# EAGLE board Emech_DevBoard_v2.0 (EAGLE 9.0.1), part 1 of 2
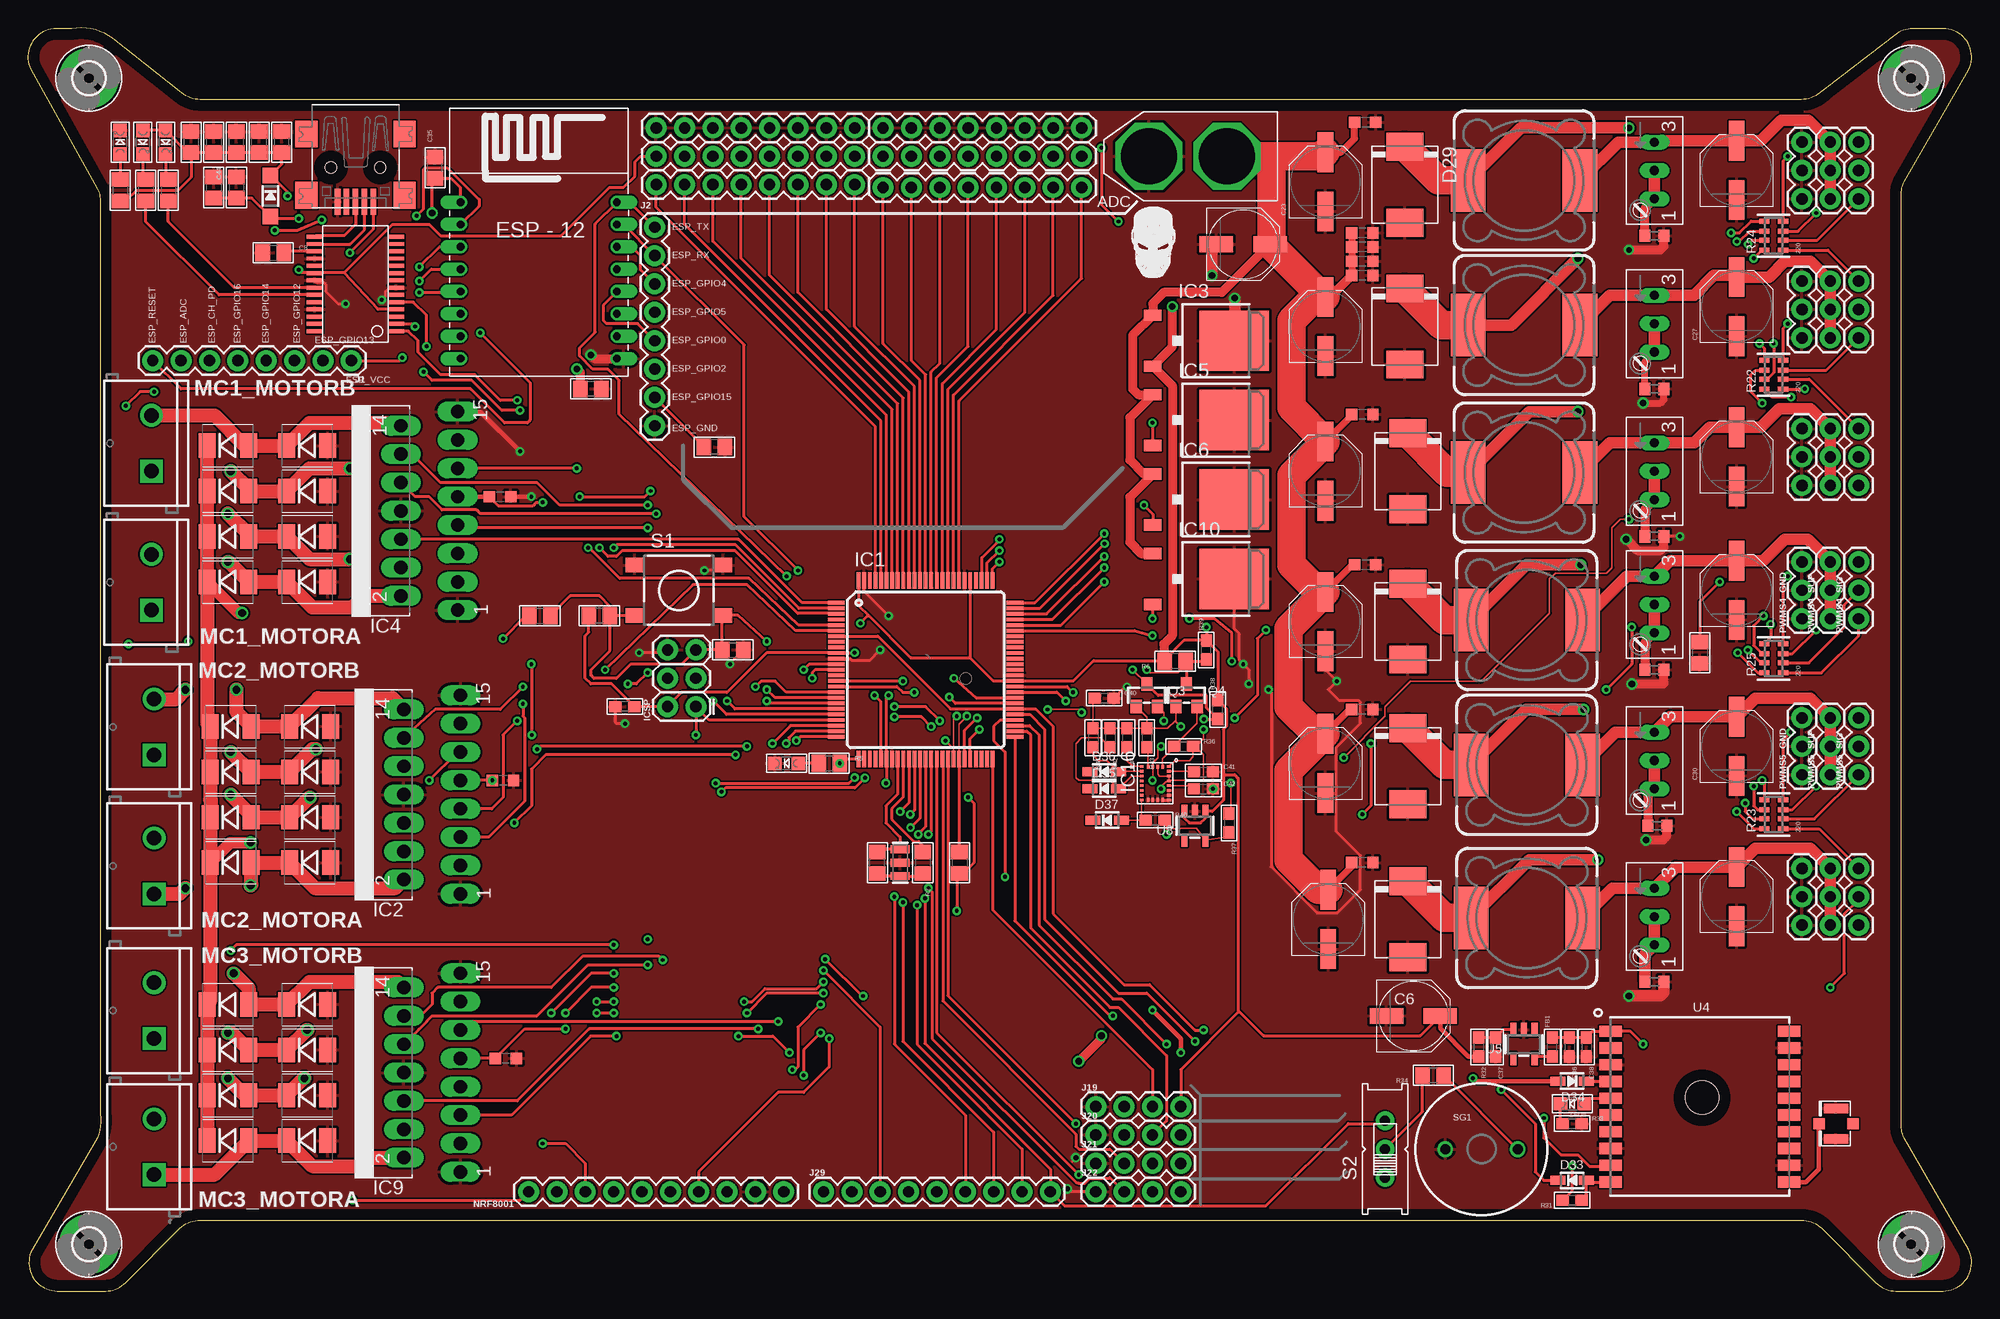
[diagram p0: board, top side]
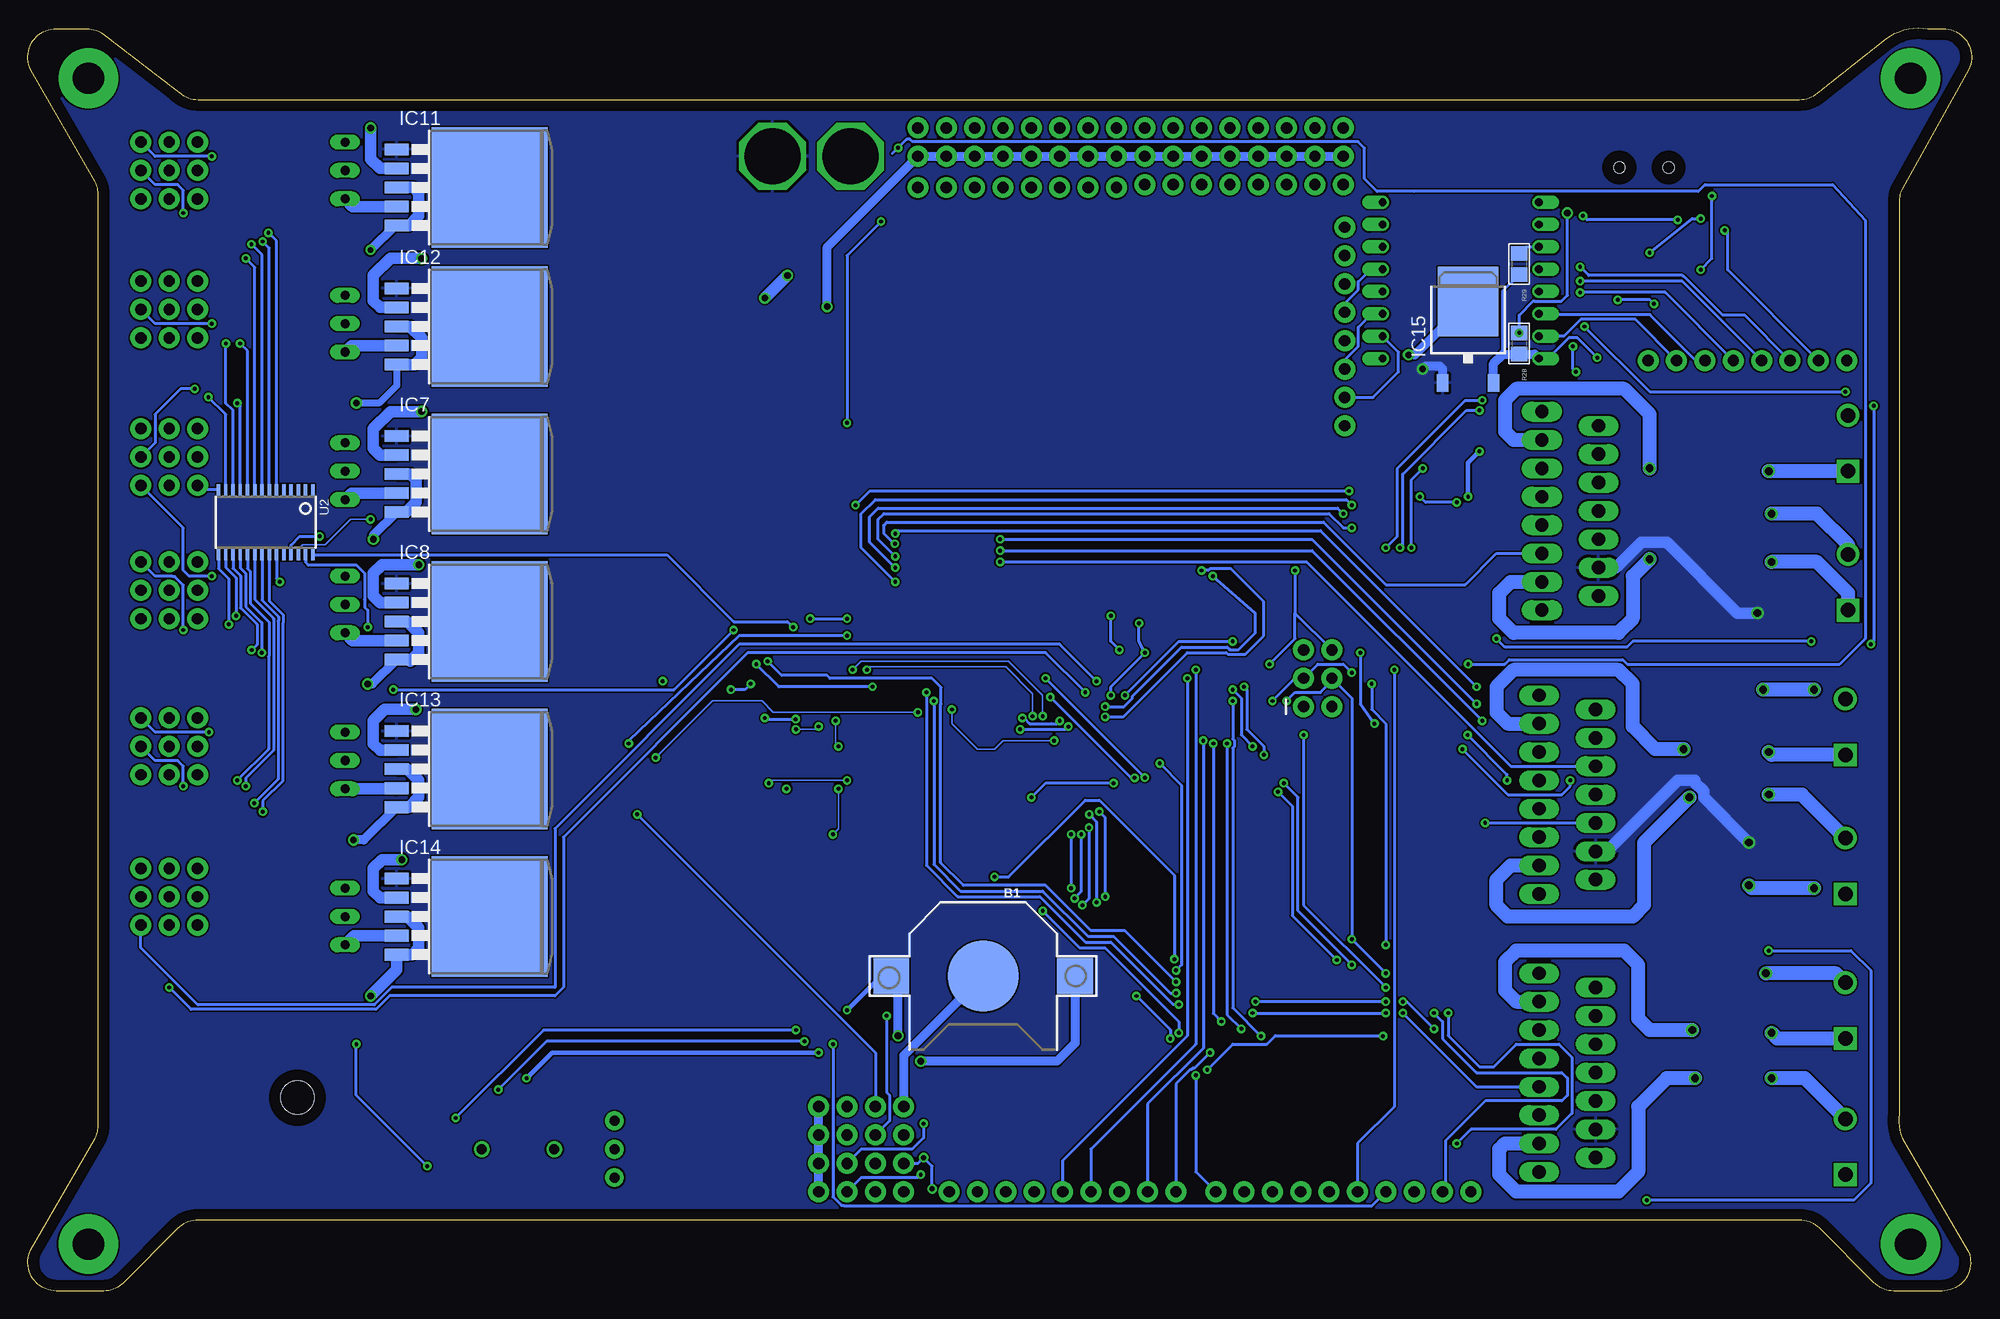
[diagram p1: board, bottom side, seen from below]

Size 174.08 x 113.09 mm. Coordinates in mm from the lower left corner, seen from the top.
Outline: 6.48,97.59 6.48,15.85 arc-27 6.21,13.68 0.37,3.69 arc117 2.63,0 6.95,0 arc45 8.75,0.74 13.61,5.61 arc-45 15.41,6.35 158.85,6.35 arc-45 160.64,5.61 165.5,0.74 arc45 167.3,0 171.54,0 arc117 173.81,3.68 168.04,13.69 arc-27 167.77,14.82 167.77,98.21 arc-27 168.04,99.34 173.81,109.35 arc117 171.54,113.03 168.82,113.03 arc45 167.03,112.29 160.64,107.42 arc-45 158.85,106.68 15.41,106.68 arc-45 13.61,107.42 7.61,112.16 arc45 3.91,113.03 2.54,113.03 arc116 0.25,109.38 6.23,98.7 arc-26 6.48,97.59
Copper layers (1*16): Top 0.035mm / dielectric 1.5mm / Bottom 0.035mm
Design rules "default *": minimum track width 6mil, minimum drill 0.35mm, track to track 6mil, track to pad 6mil, pad to pad 5mil, via to via 6mil, smd to smd 6mil, copper to edge 40mil, drill to drill 6mil, minimum pad ring 10mil, minimum via ring 8mil, stop-mask expansion 4mil, vias tented up to drill 0mil, thermal gap 10mil
Net classes: 1 16mil: width 0.254 mm, drill 0.254 mm, clearance 0.127 mm; 2 24mil: width 0.254 mm, drill 0.254 mm, clearance 0.127 mm; 3 32mil: width 0.254 mm, drill 0.254 mm, clearance 0.127 mm

## Footprints (pad centres in the part's own frame; a part is rotated, then mirrored left to right if it is on the bottom)
CR1220 = smd 3.2 x 3.2: +$1 -8.225,0; +$2 8.225,0 | smd 6.35 x 6.35: - 0,0
0805 = smd 1.3 x 1.5: 1 -0.95,0; 2 0.95,0
PANASONIC_D = smd 3 x 1.4: + 2.4,0; - -2.4,0
0603 = smd 1.016 x 1.016: 1 -0.953,0; 2 0.953,0
PANASONIC_D' = smd 3.556 x 1.4: + 2.654,0; - -2.654,0
0603' = smd 1.1 x 1: 1 -0.85,0; 2 0.85,0
USB-MINIB = smd 0.5 x 2.308: D+ 0,4.064; D- -0.8,4.064; GND 1.6,4.064; ID 0.8,4.064; VBUS -1.6,4.064 | smd 2 x 2.4: GND1 -4.4,-2; GND2 -4.4,3.5; GND3 4.4,3.5; GND4 4.4,-2 | hole 1: -2.2,1; 2.2,1
SOD-123 = smd 1.4 x 1.4: A 1.85,0; C -1.85,0
DO-214AA = smd 1.524 x 2.184: A 1.841,0; C -1.841,0
DO214AB = smd 2.5 x 3.3: A 3.4,0; C -3.4,0
SOD-323 = smd 1.35 x 0.8: A 1.27,0; C -1.27,0
2,8-PAD = drill 2.8 pad 5.334: B2,8 0,0
TQFP100 = smd 1.5 x 0.35: 1 -8,6; 2 -8,5.5; 3 -8,5; 4 -8,4.5; 5 -8,4; 6 -8,3.5; 7 -8,3; 8 -8,2.5; 9 -8,2; 10 -8,1.5; 11 -8,1; 12 -8,0.5; 13 -8,0; 14 -8,-0.5; 15 -8,-1; 16 -8,-1.5; 17 -8,-2; 18 -8,-2.5; 19 -8,-3; 20 -8,-3.5; 21 -8,-4; 22 -8,-4.5; 23 -8,-5; 24 -8,-5.5; 25 -8,-6; 51 8,-6; 52 8,-5.5; 53 8,-5; 54 8,-4.5; 55 8,-4; 56 8,-3.5; 57 8,-3; 58 8,-2.5; 59 8,-2; 60 8,-1.5; 61 8,-1; 62 8,-0.5; 63 8,0; 64 8,0.5; 65 8,1; 66 8,1.5; 67 8,2; 68 8,2.5; 69 8,3; 70 8,3.5; 71 8,4; 72 8,4.5; 73 8,5; 74 8,5.5; 75 8,6 | smd 0.35 x 1.5: 26 -6,-8; 27 -5.5,-8; 28 -5,-8; 29 -4.5,-8; 30 -4,-8; 31 -3.5,-8; 32 -3,-8; 33 -2.5,-8; 34 -2,-8; 35 -1.5,-8; 36 -1,-8; 37 -0.5,-8; 38 0,-8; 39 0.5,-8; 40 1,-8; 41 1.5,-8; 42 2,-8; 43 2.5,-8; 44 3,-8; 45 3.5,-8; 46 4,-8; 47 4.5,-8; 48 5,-8; 49 5.5,-8; 50 6,-8; 76 6,8; 77 5.5,8; 78 5,8; 79 4.5,8; 80 4,8; 81 3.5,8; 82 3,8; 83 2.5,8; 84 2,8; 85 1.5,8; 86 1,8; 87 0.5,8; 88 0,8; 89 -0.5,8; 90 -1,8; 91 -1.5,8; 92 -2,8; 93 -2.5,8; 94 -3,8; 95 -3.5,8; 96 -4,8; 97 -4.5,8; 98 -5,8; 99 -5.5,8; 100 -6,8
MULTIWATT-15 = drill 1.2 long: 1 -8.89,-7.62; 2 -7.62,-2.54; 3 -6.35,-7.62; 4 -5.08,-2.54; 5 -3.81,-7.62; 6 -2.54,-2.54; 7 -1.27,-7.62; 8 0,-2.54; 9 1.27,-7.62; 10 2.54,-2.54; 11 3.81,-7.62; 12 5.08,-2.54; 13 6.35,-7.62; 14 7.62,-2.54; 15 8.89,-7.62
TO252 = smd 1 x 1.6: 1 -2.28,-4.8; 2 2.28,-4.8 | smd 5.4 x 6.2: 3 0,2.5
TO263-5 = smd 1.067 x 2.159: 1 -3.404,-5.791; 2 -1.702,-5.791; 3 0,-5.791; 4 1.702,-5.791; 5 3.404,-5.791 | smd 10.8 x 10.41: 6 0,2.54
LGA24_3.5X3.1MM = smd 0.23 x 0.35: 1 -1.505,1.22; 6 -1.505,-1.22; 7 -1.075,-1.22; 8 -0.645,-1.22; 9 -0.215,-1.22; 10 0.215,-1.22; 11 0.645,-1.22; 12 1.075,-1.22; 13 1.505,-1.22; 18 1.505,1.22; 19 1.075,1.22; 20 0.645,1.22; 21 0.215,1.22; 22 -0.215,1.22; 23 -0.645,1.22; 24 -1.075,1.22 | smd 0.35 x 0.23: 2 -1.475,0.645; 3 -1.475,0.215; 4 -1.475,-0.215; 5 -1.475,-0.645; 14 1.475,-0.645; 15 1.475,-0.215; 16 1.475,0.215; 17 1.475,0.645
2X3 = drill 1.016 pad 1.88: 1 0,0; 2 0,2.54; 3 2.54,0; 4 2.54,2.54; 5 5.08,0; 6 5.08,2.54
1X08 = drill 1.016 pad 1.88: 1 0,0; 2 2.54,0; 3 5.08,0; 4 7.62,0; 5 10.16,0; 6 12.7,0; 7 15.24,0; 8 17.78,0
1X04 = drill 1.016 pad 1.88: 1 0,0; 2 2.54,0; 3 5.08,0; 4 7.62,0
1X09 = drill 1.016 pad 1.88: 1 0,0; 2 2.54,0; 3 5.08,0; 4 7.62,0; 5 10.16,0; 6 12.7,0; 7 15.24,0; 8 17.78,0; 9 20.32,0
SRR1280 = smd 5.6 x 3.1: 1 0.635,5; 2 0.635,-5
CHIPLED_0805 = smd 1.2 x 1.2: A 0,-1.05; C 0,1.05
SCREWTERMINAL-5MM-2 = drill 1.3 pad 2.032 square: 1 0,0 | drill 1.3 pad 2.032: 2 5,0
1X10 = drill 1.016 pad 1.88: 1 0,0; 2 2.54,0; 3 5.08,0; 4 7.62,0; 5 10.16,0; 6 12.7,0; 7 15.24,0; 8 17.78,0; 9 20.32,0; 10 22.86,0
1X03 = drill 1.016 pad 1.88: 1 0,0; 2 2.54,0; 3 5.08,0
SOT23-WIDE = smd 1 x 1.2: 1 -0.95,-1; 2 0.95,-1; 3 0,1
S64W = drill 0.813 long: A 2.54,1.27; E -2.54,1.27; S 0,1.27
R0603 = smd 1 x 1.1: 1 -0.85,0; 2 0.85,0
RESPACK_4X0603 = smd 0.45 x 0.9: 1 -1.3,-0.85; 2 -0.4,-0.85; 3 0.4,-0.85; 4 1.3,-0.85; 5 1.3,0.85; 6 0.4,0.85; 7 -0.4,0.85; 8 -1.3,0.85
DTSM-6 = smd 1.55 x 1.3: 1 -3.975,2.25; 2 3.975,2.25; 3 -3.975,-2.25; 4 3.975,-2.25
EG1218 = drill 0.9 pad 1.676: O -2.54,0; P 0,0; S 2.54,0
BUZZER-12MM = drill 0.9: + 3.25,0; - -3.25,0
SSOP28DB = smd 0.348 x 1.397: 1 -4.225,-3.656; 2 -3.575,-3.656; 3 -2.925,-3.656; 4 -2.275,-3.656; 5 -1.625,-3.656; 6 -0.975,-3.656; 7 -0.325,-3.656; 8 0.325,-3.656; 9 0.975,-3.656; 10 1.625,-3.656; 11 2.275,-3.656; 12 2.925,-3.656; 13 3.575,-3.656; 14 4.225,-3.656; 15 4.225,3.656; 16 3.575,3.656; 17 2.925,3.656; 18 2.275,3.656; 19 1.625,3.656; 20 0.975,3.656; 21 0.325,3.656; 22 -0.325,3.656; 23 -0.975,3.656; 24 -1.625,3.656; 25 -2.275,3.656; 26 -2.925,3.656; 27 -3.575,3.656; 28 -4.225,3.656
TSSOP28 = smd 0.305 x 0.991: 1 -4.225,-2.918; 2 -3.575,-2.918; 3 -2.925,-2.918; 4 -2.275,-2.918; 5 -1.625,-2.918; 6 -0.975,-2.918; 7 -0.325,-2.918; 8 0.325,-2.918; 9 0.975,-2.918; 10 1.625,-2.918; 11 2.275,-2.918; 12 2.925,-2.918; 13 3.575,-2.918; 14 4.225,-2.918; 15 4.225,2.918; 16 3.575,2.918; 17 2.925,2.918; 18 2.275,2.918; 19 1.625,2.918; 20 0.975,2.918; 21 0.325,2.918; 22 -0.325,2.918; 23 -0.975,2.918; 24 -1.625,2.918; 25 -2.275,2.918; 26 -2.925,2.918; 27 -3.575,2.918; 28 -4.225,2.918
ESP12 = drill 0.7 offset: ADC -7.1,3.8; CH_PD -7.1,1.8; GND 6.9,-8.2; GPIO0 6.9,-2.2; GPIO2 6.9,-4.2; GPIO4 6.9,1.8; GPIO5 6.9,-0.2; GPIO12 -7.1,-4.2; GPIO13 -7.1,-6.2; GPIO14 -7.1,-2.2; GPIO15 6.9,-6.2; GPIO16 -7.1,-0.2; RESET -7.1,5.8; RX 6.9,3.8; TX 6.9,5.8; VCC -7.1,-8.2
FGPMMOPA6H = smd 2 x 1: P$1 -8,6.75; P$2 -8,5.25; P$3 -8,3.75; P$4 -8,2.25; P$5 -8,0.75; P$6 -8,-0.75; P$7 -8,-2.25; P$8 -8,-3.75; P$9 -8,-5.25; P$10 -8,-6.75; P$11 8,-6.75; P$12 8,-5.25; P$13 8,-3.75; P$14 8,-2.25; P$15 8,-0.75; P$16 8,0.75; P$17 8,2.25; P$18 8,3.75; P$19 8,5.25; P$20 8,6.75 | hole 3: 0.2,0.8
SOT23-5 = smd 0.55 x 1.2: 1 -0.95,-1.3; 2 0,-1.3; 3 0.95,-1.3; 4 0.95,1.3; 5 -0.95,1.3
RESONATOR-SMD = smd 0.7 x 1.7: 1 -1.2,0; 2 0,0; 3 1.2,0
XT60 = drill 5 octagon: + 4.5,0; - 11.5,0
U.FL = smd 2.2 x 0.85: P$1 0,1.375; P$2 0,-1.375 | smd 1.05 x 1: P$3 1.525,0; P$4 -1.525,0

## Placement (x,y rotation side)
B1  CR1220  [CR1220]  88.52,28.19 180 bottom
C1  0.1uF  [0805]  20.71,102.87 90 top
C2  0.1uF  [0805]  22.74,102.87 90 top
C3  0.1uF  [0805]  18.67,102.87 90 top
C4  0.1uF  [0805]  63.12,57.4 0 top
C5  47uF  [PANASONIC_D]  108.84,93.73 0 top
C6  47uF  [PANASONIC_D]  124.08,24.64 0 top
C7  0.1uF  [0805]  45.85,60.45 0 top
C8  0.1uF  [0805]  21.98,92.96 0 top
C9  4.7uF  [0805]  18.67,98.81 270 top
C10  0.1uF  [0805]  16.64,98.81 270 top
C11  0.1uF  [0603]  119.51,94.74 180 top
C12  0.1uF  [0603]  42.3,71.12 180 top
C13  0.1uF  [0603]  119.51,93.47 180 top
C14  220uF@35V  [PANASONIC_D']  116.21,86.36 90 top
C15  0.1uF  [0603]  42.55,45.72 180 top
C16  220uF@35V  [PANASONIC_D']  153.04,74.68 90 top
C17  100nF  [0603]  119.77,104.65 180 top
C18  0.1uF  [0603]  42.8,20.83 180 top
C19  220uF@35V  [PANASONIC_D']  116.21,73.41 90 top
C20  220uF@35V  [PANASONIC_D']  153.04,62.74 90 top
C21  100nF  [0603]  119.51,90.93 180 top
C22  0.1uF  [0603]  119.51,92.2 180 top
C23  220uF@35V  [PANASONIC_D']  116.21,99.31 90 top
C24  220uF@35V  [PANASONIC_D']  153.04,100.33 90 top
C25  100nF  [0603]  119.51,78.49 180 top
C26  220uF@35V  [PANASONIC_D']  116.46,33.27 90 top
C27  220uF@35V  [PANASONIC_D']  153.04,88.14 90 top
C28  100nF  [0603]  119.77,65.02 180 top
C29  220uF@35V  [PANASONIC_D']  116.21,59.94 90 top
C30  220uF@35V  [PANASONIC_D']  153.04,48.77 90 top
C31  100nF  [0603]  119.51,52.07 180 top
C32  220uF@35V  [PANASONIC_D']  116.21,47.24 90 top
C33  220uF@35V  [PANASONIC_D']  153.04,35.31 90 top
C34  100nF  [0603]  119.51,38.35 180 top
C35  0.1uF  [0805]  36.45,100.58 90 top
C36  10µF  [0603']  138.05,21.84 270 top
C37  10µF  [0603']  131.45,21.84 270 top
C38  0.1µF  [0603']  139.58,21.84 270 top
C39  10µF  [0603']  53.47,52.32 180 top
C40  10µF  [0603']  96.4,53.09 0 top
C41  0.22uF  [0603']  105.29,46.48 0 top
C42  10uF  [0603']  105.29,44.96 0 top
C43  0.33uF  [0805]  50.42,80.77 180 top
C44  0.1uF  [0805]  16.64,102.87 270 top
CN2  [USB-MINIB]  29.34,101.6 180 top
D2  [SOD-123]  21.72,98.04 270 top
D3  SS24FSCT-ND  [DO-214AA]  25.02,63.5 0 top
D4  SS24FSCT-ND  [DO-214AA]  25.02,67.56 0 top
D5  SS24FSCT-ND  [DO-214AA]  25.02,71.63 0 top
D6  SS24FSCT-ND  [DO-214AA]  25.02,75.69 0 top
D7  SS24FSCT-ND  [DO-214AA]  17.91,75.69 0 top
D8  SS24FSCT-ND  [DO-214AA]  17.91,71.63 0 top
D9  SS24FSCT-ND  [DO-214AA]  17.91,67.56 0 top
D10  SS24FSCT-ND  [DO-214AA]  17.91,63.5 0 top
D11  SS24FSCT-ND  [DO-214AA]  18.17,38.35 0 top
D12  SS24FSCT-ND  [DO-214AA]  18.17,42.42 0 top
D13  SS24FSCT-ND  [DO-214AA]  18.17,46.48 0 top
D14  SS24FSCT-ND  [DO-214AA]  18.17,50.55 0 top
D15  SS24FSCT-ND  [DO-214AA]  25.28,38.35 0 top
D16  SS24FSCT-ND  [DO-214AA]  25.28,42.42 0 top
D17  SS24FSCT-ND  [DO-214AA]  25.28,46.48 0 top
D18  SS24FSCT-ND  [DO-214AA]  25.28,50.55 0 top
D19  SS54  [DO214AB]  123.58,73.41 270 top
D20  SS54  [DO214AB]  123.58,59.94 270 top
D21  SS24FSCT-ND  [DO-214AA]  17.91,13.46 0 top
D22  SS24FSCT-ND  [DO-214AA]  17.91,17.53 0 top
D23  SS24FSCT-ND  [DO-214AA]  17.91,21.59 0 top
D24  SS24FSCT-ND  [DO-214AA]  17.91,25.65 0 top
D25  SS24FSCT-ND  [DO-214AA]  25.02,13.46 0 top
D26  SS24FSCT-ND  [DO-214AA]  25.02,17.53 0 top
D27  SS24FSCT-ND  [DO-214AA]  25.02,21.59 0 top
D28  SS24FSCT-ND  [DO-214AA]  25.02,25.65 0 top
D29  SS54  [DO214AB]  123.32,99.06 270 top
D30  SS54  [DO214AB]  123.32,86.36 270 top
D31  SS54  [DO214AB]  123.58,46.99 270 top
D32  SS54  [DO214AB]  123.58,33.27 270 top
D33  1N4148  [SOD-323]  138.31,9.91 0 top
D34  CUS520  [SOD-323]  138.31,18.8 180 top
D35  1N4148  [SOD-323]  96.4,44.96 0 top
D36  1N4148  [SOD-323]  96.4,46.48 0 top
D37  1N4148  [SOD-323]  96.65,42.16 0 top
FB1  [0603']  136.53,21.84 90 top
H1  MOUNT-PAD-ROUND2.8  [2,8-PAD]  168.66,4.19 0 top
H2  MOUNT-PAD-ROUND2.8  [2,8-PAD]  168.66,108.58 0 top
H3  MOUNT-PAD-ROUND2.8  [2,8-PAD]  5.47,108.58 0 top
H4  MOUNT-PAD-ROUND2.8  [2,8-PAD]  5.47,4.19 0 top
IC1  ATMEGA2560  [TQFP100]  80.4,55.63 0 top
IC2  L298  [MULTIWATT-15]  31.12,44.45 90 top
IC3  UA78M05  [TO252]  105.54,85.09 270 top
IC4  L298  [MULTIWATT-15]  30.87,69.85 90 top
IC5  7806DT  [TO252]  105.54,77.98 270 top
IC6  7806DT  [TO252]  105.54,70.87 270 top
IC7  LM2596S  [TO263-5]  135.26,73.15 270 bottom
IC8  LM2596S  [TO263-5]  135.26,59.94 270 bottom
IC9  L298  [MULTIWATT-15]  31.12,19.56 90 top
IC10  7806DT  [TO252]  105.54,63.75 270 top
IC11  LM2596S  [TO263-5]  135.26,98.81 270 bottom
IC12  LM2596S  [TO263-5]  135.26,86.36 270 bottom
IC13  LM2596S  [TO263-5]  135.26,46.74 270 bottom
IC14  LM2596S  [TO263-5]  135.26,33.53 270 bottom
IC15  7806DT  [TO252]  45.09,86.11 0 bottom
IC16  LSM9DS1  [LGA24_3.5X3.1MM]  100.97,45.47 270 top
ICSP  FEMALE 2x3  [2X3]  59.82,52.32 90 top
J1  [1X08]  28.96,83.31 180 top
J2  [1X08]  56.14,95.25 270 top
J19  [1X04]  95.64,16.51 0 top
J20  [1X04]  95.64,13.97 0 top
J21  [1X04]  95.64,11.43 0 top
J22  [1X04]  95.64,8.89 0 top
J23  [1X08]  76.59,101.6 0 top
J24  [1X08]  76.59,104.14 0 top
J25  [1X08]  74.05,99.06 180 top
J26  [1X08]  56.27,104.14 0 top
J27  [1X08]  56.27,101.6 0 top
J28  [1X08]  94.37,98.81 180 top
J29  [1X09]  71.25,8.89 0 top
L1  SRR1280-330mH  [SRR1280]  133.99,72.64 90 top
L2  SRR1280-330mH  [SRR1280]  134.24,59.44 90 top
L3  SRR1280-330mH  [SRR1280]  133.99,98.81 90 top
L4  SRR1280-330mH  [SRR1280]  133.99,85.85 90 top
L5  SRR1280-330mH  [SRR1280]  134.24,46.48 90 top
L6  SRR1280-330mH  [SRR1280]  134.24,32.77 90 top
LED1  GREEN  [CHIPLED_0805]  8.26,102.87 0 top
LED2  YELLOW  [CHIPLED_0805]  67.95,47.24 90 top
LED3  BLUE  [CHIPLED_0805]  10.29,102.87 180 top
LED4  RED  [CHIPLED_0805]  12.32,102.87 180 top
LED5  RED  [CHIPLED_0805]  138.31,16.76 90 top
MC1_MOTORA  [SCREWTERMINAL-5MM-2]  11.05,60.96 90 top
MC1_MOTORB  [SCREWTERMINAL-5MM-2]  11.05,73.41 90 top
MC2_MOTORA  [SCREWTERMINAL-5MM-2]  11.31,35.56 90 top
MC2_MOTORB  [SCREWTERMINAL-5MM-2]  11.31,48.01 90 top
MC3_MOTORA  [SCREWTERMINAL-5MM-2]  11.31,10.41 90 top
MC3_MOTORB  [SCREWTERMINAL-5MM-2]  11.31,22.61 90 top
NRF8001  [1X10]  44.84,8.89 0 top
PWMS1_GND  [1X03]  158.88,97.79 90 top
PWMS1_SIG  [1X03]  163.96,97.79 90 top
PWMS1_SUP  [1X03]  161.42,97.79 90 top
PWMS2_GND  [1X03]  158.88,85.34 90 top
PWMS2_SIG  [1X03]  163.96,85.34 90 top
PWMS2_SUP  [1X03]  161.42,85.34 90 top
PWMS3_GND  [1X03]  158.88,72.14 90 top
PWMS3_SIG  [1X03]  163.96,72.14 90 top
PWMS3_SUP  [1X03]  161.42,72.14 90 top
PWMS4_GND  [1X03]  158.88,60.2 90 top
PWMS4_SIG  [1X03]  163.96,60.2 90 top
PWMS4_SUP  [1X03]  161.42,60.2 90 top
PWMS5_GND  [1X03]  158.88,46.23 90 top
PWMS5_SIG  [1X03]  163.96,46.23 90 top
PWMS5_SUP  [1X03]  161.42,46.23 90 top
PWMS6_GND  [1X03]  158.88,32.77 90 top
PWMS6_SIG  [1X03]  163.96,32.77 90 top
PWMS6_SUP  [1X03]  161.42,32.77 90 top
Q3  BSS138  [SOT23-WIDE]  100.21,53.34 0 top
Q4  BSS138  [SOT23-WIDE]  103.76,53.34 0 top
R1  1m  [0805]  76.08,38.35 90 top
R2  27  [0805]  80.14,38.35 270 top
R3  10k  [0805]  51.19,60.45 180 top
R4  1k  [0805]  8.26,98.55 270 top
R5  1k  [0805]  71.76,47.24 0 top
R6  10k  [0805]  102.75,56.39 180 top
R7  10k  [0805]  83.44,38.35 270 top
R8  680  [0805]  10.55,98.55 270 top
R9  680  [0805]  12.58,98.55 270 top
R10  10k  [S64W]  144.4,73.41 270 top
R11  330  [R0603]  145.67,67.56 180 top
R12  10k  [S64W]  144.4,61.47 270 top
R13  330  [R0603]  145.67,55.63 180 top
R14  10k  [S64W]  144.4,100.33 270 top
R15  330  [R0603]  145.67,94.49 180 top
R16  10k  [S64W]  144.4,86.61 270 top
R17  330  [R0603]  145.67,80.77 180 top
R18  10k  [S64W]  144.4,47.5 270 top
R19  330  [R0603]  145.93,41.66 180 top
R20  10k  [S64W]  144.4,33.53 270 top
R21  330  [R0603]  145.67,27.69 180 top
R22  220  [RESPACK_4X0603]  156.34,82.04 90 top
R23  220  [RESPACK_4X0603]  156.34,42.67 90 top
R24  220  [RESPACK_4X0603]  156.34,94.49 90 top
R25  220  [RESPACK_4X0603]  156.34,56.64 90 top
R26  10k  [0805]  149.74,57.15 270 top
R27  10k  [0805]  14.61,102.87 270 top
R28  10k  [0805]  40.52,84.84 270 bottom
R29  1k  [0805]  40.52,91.95 270 bottom
R30  1k  [0805]  61.47,75.56 180 top
R31  10k  [0603']  138.31,8.13 180 top
R32  10k  [0603']  129.93,21.84 270 top
R33  1k  [0603']  138.31,14.99 0 top
R34  100  [0805]  125.86,19.3 180 top
R36  10K  [0603']  103.51,48.77 0 top
R37  10K  [0603']  107.57,41.91 270 top
R38  10K  [0603']  106.56,52.07 90 top
R39  10K  [0603']  105.54,57.4 90 top
R40  10K  [0603']  100.97,42.16 0 top
R41  10K  [0603']  95.38,49.53 270 top
R42  10K  [0603']  96.91,49.53 270 top
R43  10K  [0603']  100.21,49.53 270 top
R44  10K  [0603']  98.43,49.53 270 top
S1  DTSM-6  [DTSM-6]  58.3,62.74 0 top
S2  [EG1218]  121.54,12.7 90 top
SG1  BUZZERPTH  [BUZZER-12MM]  130.18,12.7 0 top
U1  [SSOP28DB]  29.34,90.17 90 top
U2  PCA9685  [TSSOP28]  152.79,68.83 180 bottom
U3  [ESP12]  45.85,91.69 0 top
U4  FGPMMOPA6H  [FGPMMOPA6H]  149.74,16.51 0 top
U5  MIC5225-3.3  [SOT23-5]  133.99,22.1 180 top
U8  MIC5225-3.3  [SOT23-5]  104.53,41.66 180 top
U$1  RESONATORSMD  [RESONATOR-SMD]  78.11,38.35 270 top
U$14  XT60  [XT60]  111.89,101.6 180 top
U$55  U.FL  [U.FL]  161.93,14.99 180 top

## Library data of the parts
B1 C1-C4 C7-C10 C14 C16 C19 C20 C23 C24 C26 C27 C29 C30 C32 C33 C35-C44 D2 D33-D37 FB1 IC16 LED1-LED5 Q3 Q4 R1-R9 R22-R34 R36-R44 U1 U2 U4 U5 U8 U$55 = microbuilder
C5 C6 = rcl; SPICEPREFIX: C
C11-C13 C15 C17 C18 C21 C22 C25 C28 C31 C34 = cap-master
CN2 IC3 IC5 IC6 IC10 IC15 R11 R13 R15 R17 R19 R21 S2 = adafruit
D3-D18 D21-D28 = BeagleBone_Blue_R3
D19 D20 D29-D32 = s3x_10; MF: Fairchild; MPN: S3G; OC_FARNELL: 2454094; OC_NEWARK: 58K2397
H1-H4 = holes
IC1 = atmel-2005
IC2 IC4 IC9 = st-microelectronics; MPN: L298N; OC_FARNELL: 1589425; OC_NEWARK: 32M1527
IC7 IC8 IC11-IC14 = national-semiconductor; MF: NATIONAL SEMICONDUCTOR; MPN: LM2596S-ADJ/NOPB; OC_FARNELL: 9494367; OC_NEWARK: 41K3842
ICSP = SparkFun-Connectors; PROD_ID: CONN-11566
J1 J2 J23-J28 = SparkFun-Connectors; PROD_ID: CONN-08438
J19-J22 = SparkFun-Connectors; PROD_ID: CONN-09696
J29 PWMS1_GND PWMS1_SIG PWMS1_SUP PWMS2_GND PWMS2_SIG PWMS2_SUP PWMS3_GND PWMS3_SIG PWMS3_SUP PWMS4_GND PWMS4_SIG PWMS4_SUP PWMS5_GND PWMS5_SIG PWMS5_SUP PWMS6_GND PWMS6_SIG PWMS6_SUP = SparkFun-Connectors
L1-L6 = inductor-bourns
MC1_MOTORA MC1_MOTORB MC2_MOTORA MC2_MOTORB MC3_MOTORA MC3_MOTORB = SparkFun-Connectors; SF_SKU: PRT-08432
NRF8001 = SparkFun-Connectors; PROD_ID: CONN-11563
R10 R12 R14 R16 R18 R20 = pot
S1 = switch-tact
SG1 U$1 = SparkFun
U3 = esp8266modules
U$14 = XT60

## Nets
1PPS: U4.P$13
3.3V [16mil]: C8.2 U1.17
5.0V: U5.1
A0: U2.1
A1: U2.2
A2: U2.3
A3: U2.4
A4: U2.5
A5: U2.24
ADC0: IC1.97 J25.8
ADC1: IC1.96 J25.7
ADC2: IC1.95 J25.6
ADC3: IC1.94 J25.5
ADC4: IC1.93 J25.4
ADC5: IC1.92 J25.3
ADC6: IC1.91 J25.2
ADC7: IC1.90 J25.1
ADC8: IC1.89 J28.8
ADC9: IC1.88 J28.7
ADC10: IC1.87 J28.6
ADC11: IC1.86 J28.5
ADC12: IC1.85 J28.4
ADC13: IC1.84 J28.3
ADC14: IC1.83 J28.2
ADC15: IC1.82 J28.1
AREF: IC1.98
AUX_D1: IC1.38 J29.9 S2.S
AUX_D2: IC1.37 J29.8
AUX_D3: IC1.36 J29.7
AUX_D4: IC1.35 J29.6
AUX_D5: IC1.13 J29.5
AUX_D6: IC1.12 J29.4
AUX_D7: IC1.26 J29.3 R5.2
AUX_D8: IC1.25 J29.2
AUX_D9: IC1.19 J29.1
C2: C41.1 IC16.24
CAP1: C42.1 IC16.21
CS_A/G: D36.A IC16.7 R41.2
CS_AG_5V: D36.C
CS_M: D35.A IC16.8 R42.2
CS_M_5V: D35.C
D0/RX0: IC1.2 U1.1
D1/TX0: IC1.3 U1.5
D9: NRF8001.6
D14/TX3: IC1.64
D15/RX3: IC1.63
D+: CN2.D+ U1.15
D-: CN2.D- U1.16
DEN_3V: D37.A IC16.13 R40.1
DEN_5V: D37.C
DRDY_M: IC16.9
ESP_ADC: J1.7 U3.ADC
ESP_CH_PD: J1.6 R29.1 U3.CH_PD
ESP_GPIO0: J2.5 U3.GPIO0
ESP_GPIO2: J2.6 U3.GPIO2
ESP_GPIO4: J2.3 U3.GPIO4
ESP_GPIO5: J2.4 U3.GPIO5
ESP_GPIO12: J1.3 U3.GPIO12
ESP_GPIO13: J1.2 U3.GPIO13
ESP_GPIO14: J1.4 U3.GPIO14
ESP_GPIO15: J2.7 R30.2 U3.GPIO15
ESP_GPIO16: J1.5 U3.GPIO16
ESP_RESET: C35.1 J1.8 R28.1 U3.RESET
ESP_VCC: IC15.2 J1.1 R28.2 R29.2 U3.VCC
FIX: LED5.A U4.P$5
GND [32mil]: B1.- C1.2 C2.2 C3.2 C4.2 C5.- C6.- C8.1 C9.1 C10.1 C11.1 C12.1 C13.1 C14.- C15.1 C16.- C17.1 C18.1 C19.- C20.- C21.1 C22.1 C23.- C24.- C25.1 C26.- C27.- C28.1 C29.- C30.- C31.1 C32.- C33.- C34.1 C35.2 C36.2 C37.2 C38.2 C39.2 C40.2 C41.2 C42.2 C43.1 C44.1 CN2.GND D3.A D4.A D5.A D6.A D15.A D16.A D17.A D18.A D19.A D20.A D25.A D26.A D27.A D28.A D29.A D30.A D31.A D32.A H1.B2,8 H2.B2,8 H3.B2,8 H4.B2,8 IC1.11 IC1.32 IC1.62 IC1.81 IC1.99 IC2.1 IC2.8 IC2.15 IC3.3 IC4.1 IC4.8 IC4.15 IC5.3 IC6.3 IC7.3 IC7.5 IC8.3 IC8.5 IC9.1 IC9.8 IC9.15 IC10.3 IC11.3 IC11.5 IC12.3 IC12.5 IC13.3 IC13.5 IC14.3 IC14.5 IC15.3 IC16.14 IC16.15 IC16.16 IC16.17 IC16.18 IC16.19 IC16.20 ICSP.6 J2.8 J19.1 J20.1 J21.1 J22.1 J24.1 J24.2 J24.3 J24.4 J24.5 J24.6 J24.7 J24.8 J26.1 J26.2 J26.3 J26.4 J26.5 J26.6 J26.7 J26.8 LED1.C LED2.C NRF8001.9 PWMS1_GND.1 PWMS1_GND.2 PWMS1_GND.3 PWMS2_GND.1 PWMS2_GND.2 PWMS2_GND.3 PWMS3_GND.1 PWMS3_GND.2 PWMS3_GND.3 PWMS4_GND.1 PWMS4_GND.2 PWMS4_GND.3 PWMS5_GND.1 PWMS5_GND.2 PWMS5_GND.3 PWMS6_GND.1 PWMS6_GND.2 PWMS6_GND.3 R11.1 R13.1 R15.1 R17.1 R19.1 R21.1 R26.2 R27.1 R30.1 R33.2 S1.1 S1.2 SG1.- U1.7 U1.18 U1.21 U1.25 U2.14 U2.25 U3.GND U4.P$3 U4.P$8 U4.P$12 U4.P$19 U5.2 U8.2 U$1.2 U$14.- U$55.P$1 U$55.P$2
GPS_RX: D33.C IC1.55
GPS_TX: IC1.7 IC1.56 U4.P$9
INT1_AG: IC16.11
INT2_AG: IC16.12
INT_M: IC16.10
MCONTROLR1_INP1: IC1.78 IC2.5
MCONTROLR1_INP2: IC1.77 IC2.7
MCONTROLR1_INP3: IC1.76 IC2.10
MCONTROLR1_INP4: IC1.75 IC2.12
MCONTROLR2_INP1: IC1.74 IC4.5
MCONTROLR2_INP2: IC1.73 IC4.7
MCONTROLR2_INP3: IC1.72 IC4.10
MCONTROLR2_INP4: IC1.71 IC4.12
MCONTROLR3_INP1: IC1.60 IC9.5
MCONTROLR3_INP2: IC1.59 IC9.7
MCONTROLR3_INP3: IC1.58 IC9.10
MCONTROLR3_INP4: IC1.57 IC9.12
MISO: IC1.22 ICSP.1 NRF8001.2
MOSI: IC1.21 ICSP.4 NRF8001.3
MOTOR1_PWM_A: IC1.1 IC4.6
MOTOR1_PWM_B: IC1.5 IC4.11
MOTOR2_PWM_A: IC1.17 IC2.6
MOTOR2_PWM_B: IC1.18 IC2.11
MOTOR3_PWM_A: IC1.23 IC9.6
MOTOR3_PWM_B: IC1.24 IC9.11
N$1: IC1.65
N$2: IC1.66
N$3: R1.1 R2.2 U$1.3
N$4: IC1.67
N$5: IC1.68
N$6: IC1.69
N$7: IC1.79
N$8: IC1.27
N$9: IC1.9
N$10: IC1.49
N$11: IC1.48
N$12: IC1.47
N$13: IC1.14
N$14: IC1.8
N$15: C12.2 IC4.9 IC6.2
N$16: D19.C IC7.2 L1.1
N$17: C15.2 IC2.9 IC5.2
N$18: IC1.4
N$19: LED1.A R4.1
N$20: LED2.A R5.1
N$21: LED3.C R8.1
N$22: R9.2 U1.22
N$23: R8.2 U1.23
N$24: LED4.C R9.1
N$25: IC1.29
N$26: IC1.28
N$27: IC7.4 R10.A R10.S R11.2
N$28: U1.26
N$29: U1.11
N$30: U1.3
N$31: C7.1 U1.2
N$32: D20.C IC8.2 L2.1
N$33: D3.C D10.A IC4.2 MC1_MOTORA.1
N$34: D4.C D9.A IC4.3 MC1_MOTORA.2
N$35: D5.C D8.A IC4.13 MC1_MOTORB.1
N$36: D6.C D7.A IC4.14 MC1_MOTORB.2
N$37: IC8.4 R12.A R12.S R13.2
N$38: D21.A D25.C IC9.2 MC3_MOTORA.1
N$39: D22.A D26.C IC9.3 MC3_MOTORA.2
N$40: D23.A D27.C IC9.13 MC3_MOTORB.1
N$41: D24.A D28.C IC9.14 MC3_MOTORB.2
N$42: C18.2 IC9.9 IC10.2
N$43: D29.C IC11.2 L3.1
N$44: IC11.4 R14.A R14.S R15.2
N$45: D30.C IC12.2 L4.1
N$46: D11.A D15.C IC2.2 MC2_MOTORA.1
N$47: D12.A D16.C IC2.3 MC2_MOTORA.2
N$48: D13.A D17.C IC2.13 MC2_MOTORB.1
N$49: D14.A D18.C IC2.14 MC2_MOTORB.2
N$50: IC12.4 R16.A R16.S R17.2
N$51: D31.C IC13.2 L5.1
N$52: IC13.4 R18.A R18.S R19.2
N$53: D32.C IC14.2 L6.1
N$54: IC14.4 R20.A R20.S R21.2
N$55: PWMS1_SIG.3 R24.4
N$57: PWMS6_SIG.3 R23.1
N$58: PWMS5_SIG.1 R23.2
N$59: PWMS5_SIG.2 R23.3
N$60: PWMS5_SIG.3 R23.4
N$61: PWMS4_SIG.1 R25.1
N$62: PWMS4_SIG.2 R25.2
N$63: PWMS4_SIG.3 R25.3
N$64: PWMS3_SIG.1 R25.4
N$65: PWMS3_SIG.2 R22.1
N$66: PWMS3_SIG.3 R22.2
N$67: PWMS2_SIG.1 R22.3
N$68: PWMS2_SIG.2 R22.4
N$69: PWMS2_SIG.3 R24.1
N$70: PWMS1_SIG.2 R24.3
N$71: PWMS1_SIG.1 R24.2
N$73: U4.P$11 U$55.P$3
N$75: D33.A R31.1 U4.P$10
N$76: NRF8001.8
N$77: C36.1 C38.1 FB1.2 R31.2 U4.P$1
N$78: C37.1 R32.1 U5.3
N$79: LED5.C R33.1
N$80: B1.+$1 B1.+$2 D34.A
N$81: R34.2 S2.P
N$82: R34.1 SG1.+
NRF_RDY: IC1.6 NRF8001.5
NRF_REQ: IC1.53 NRF8001.4
NRF_RST: IC1.54 NRF8001.7
OE: R26.1 U2.23
OUT: FB1.1 U5.5
PWM0: R24.5 U2.6
PWM1: R24.6 U2.7
PWM2: R24.7 U2.8
PWM3: R24.8 U2.9
PWM4: R22.5 U2.10
PWM5: R22.6 U2.11
PWM6: R22.7 U2.12
PWM7: R22.8 U2.13
PWM8: R25.5 U2.15
PWM9: R25.6 U2.16
PWM10: R25.7 U2.17
PWM11: R25.8 U2.18
PWM12: R23.5 U2.19
PWM13: R23.6 U2.20
PWM14: R23.7 U2.21
PWM15: R23.8 U2.22
PWM16: IC1.16 PWMS6_SIG.2
PWM17: IC1.15 PWMS6_SIG.1
RESET: C4.1 C7.2 IC1.30 ICSP.5 R3.1 S1.3 S1.4
SCK: IC1.20 ICSP.3 NRF8001.1
SCL: IC1.43 Q4.3 R6.1 R39.1 U2.26
SCL_3V: IC16.2 Q4.2 R36.1
SDA: IC1.44 Q3.3 R7.1 R38.1 U2.27
SDA_3V: IC16.4 Q3.2 R37.1
SDO_AG: IC16.5 R43.2
SDO_M: IC16.6 R44.2
SW_MODE_SUPPLY1: C24.+ L3.2 PWMS1_SUP.1 PWMS1_SUP.2 PWMS1_SUP.3 R14.E
SW_MODE_SUPPLY2: C27.+ L4.2 PWMS2_SUP.1 PWMS2_SUP.2 PWMS2_SUP.3 R16.E
SW_MODE_SUPPLY3: C16.+ L1.2 PWMS3_SUP.1 PWMS3_SUP.2 PWMS3_SUP.3 R10.E
SW_MODE_SUPPLY4: C20.+ L2.2 PWMS4_SUP.1 PWMS4_SUP.2 PWMS4_SUP.3 R12.E
SW_MODE_SUPPLY5: C30.+ L5.2 PWMS5_SUP.1 PWMS5_SUP.2 PWMS5_SUP.3 R18.E
SW_MODE_SUPPLY6: C33.+ L6.2 PWMS6_SUP.1 PWMS6_SUP.2 PWMS6_SUP.3 R20.E
UC_5V [16mil]: C1.1 C2.1 C3.1 C6.+ C39.1 C44.2 D2.C IC1.10 IC1.31 IC1.61 IC1.80 IC1.100 IC3.2 ICSP.2 J19.4 J20.4 J21.4 J22.4 J23.1 J23.2 J23.3 J23.4 J23.5 J23.6 J23.7 J23.8 J27.1 J27.2 J27.3 J27.4 J27.5 J27.6 J27.7 J27.8 LED3.A LED4.A NRF8001.10 R3.2 R4.2 R6.2 R7.2 R27.2 R32.2 R38.2 R39.2 U1.4 U1.20 U2.28 U8.1 U8.3
US1_D1: IC1.50 J19.3
US1_D2: IC1.70 J19.2
US2_D1: IC1.52 J20.3
US2_D2: IC1.51 J20.2
US3_D1: IC1.42 J21.3
US3_D2: IC1.41 J21.2
US4_D1: IC1.40 J22.3
US4_D2: IC1.39 J22.2
VBACKUP: D34.C U4.P$4
VDD: C40.1 IC16.1 IC16.3 IC16.22 IC16.23 Q3.1 Q4.1 R36.2 R37.2 R40.2 R41.1 R42.1 R43.1 R44.1 U8.5
VIN [24mil]: C5.+ C11.2 C13.2 C14.+ C17.2 C19.+ C21.2 C22.2 C23.+ C25.2 C26.+ C28.2 C29.+ C31.2 C32.+ C34.2 C43.2 D7.C D8.C D9.C D10.C D11.C D12.C D13.C D14.C D21.C D22.C D23.C D24.C IC2.4 IC3.1 IC4.4 IC5.1 IC6.1 IC7.1 IC8.1 IC9.4 IC10.1 IC11.1 IC12.1 IC13.1 IC14.1 IC15.1 U$14.+
VUSB [16mil]: C9.2 C10.2 CN2.VBUS D2.A
WIFI_RX: IC1.46 J2.2 U3.RX
WIFI_TX: IC1.45 J2.1 U3.TX
XTAL1: IC1.34 R2.1
XTAL2: IC1.33 R1.2 U$1.1